# EAGLE board avr_programming_shield_Zif-Bill7 (EAGLE 6.4)
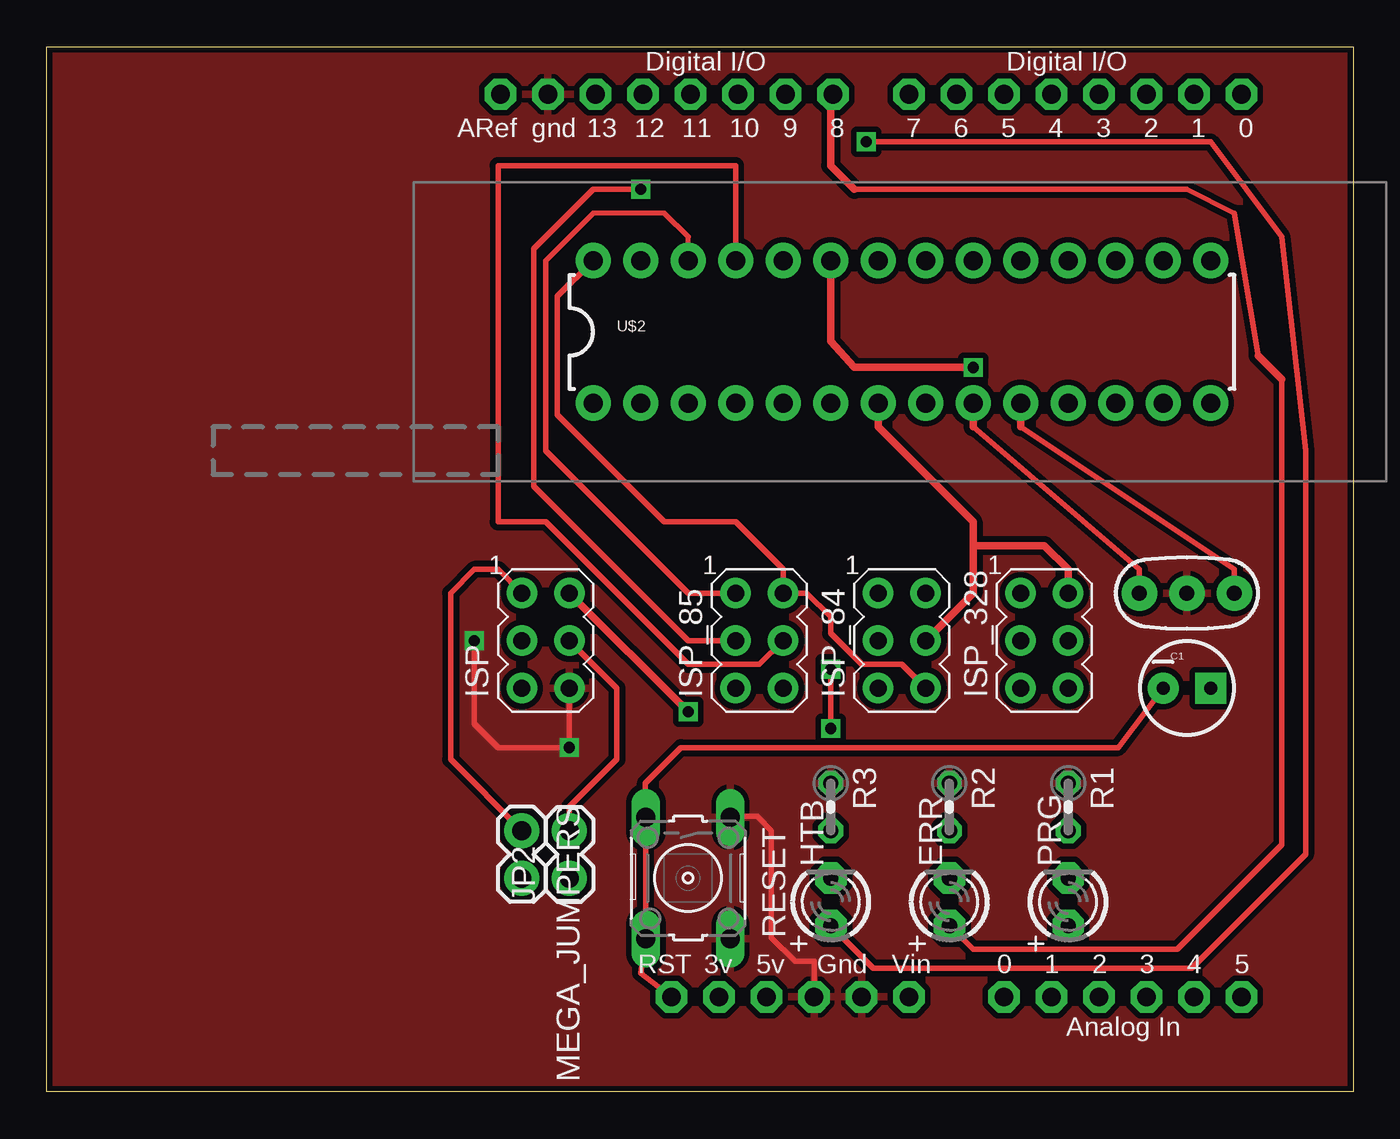
[diagram p0: board, top side]
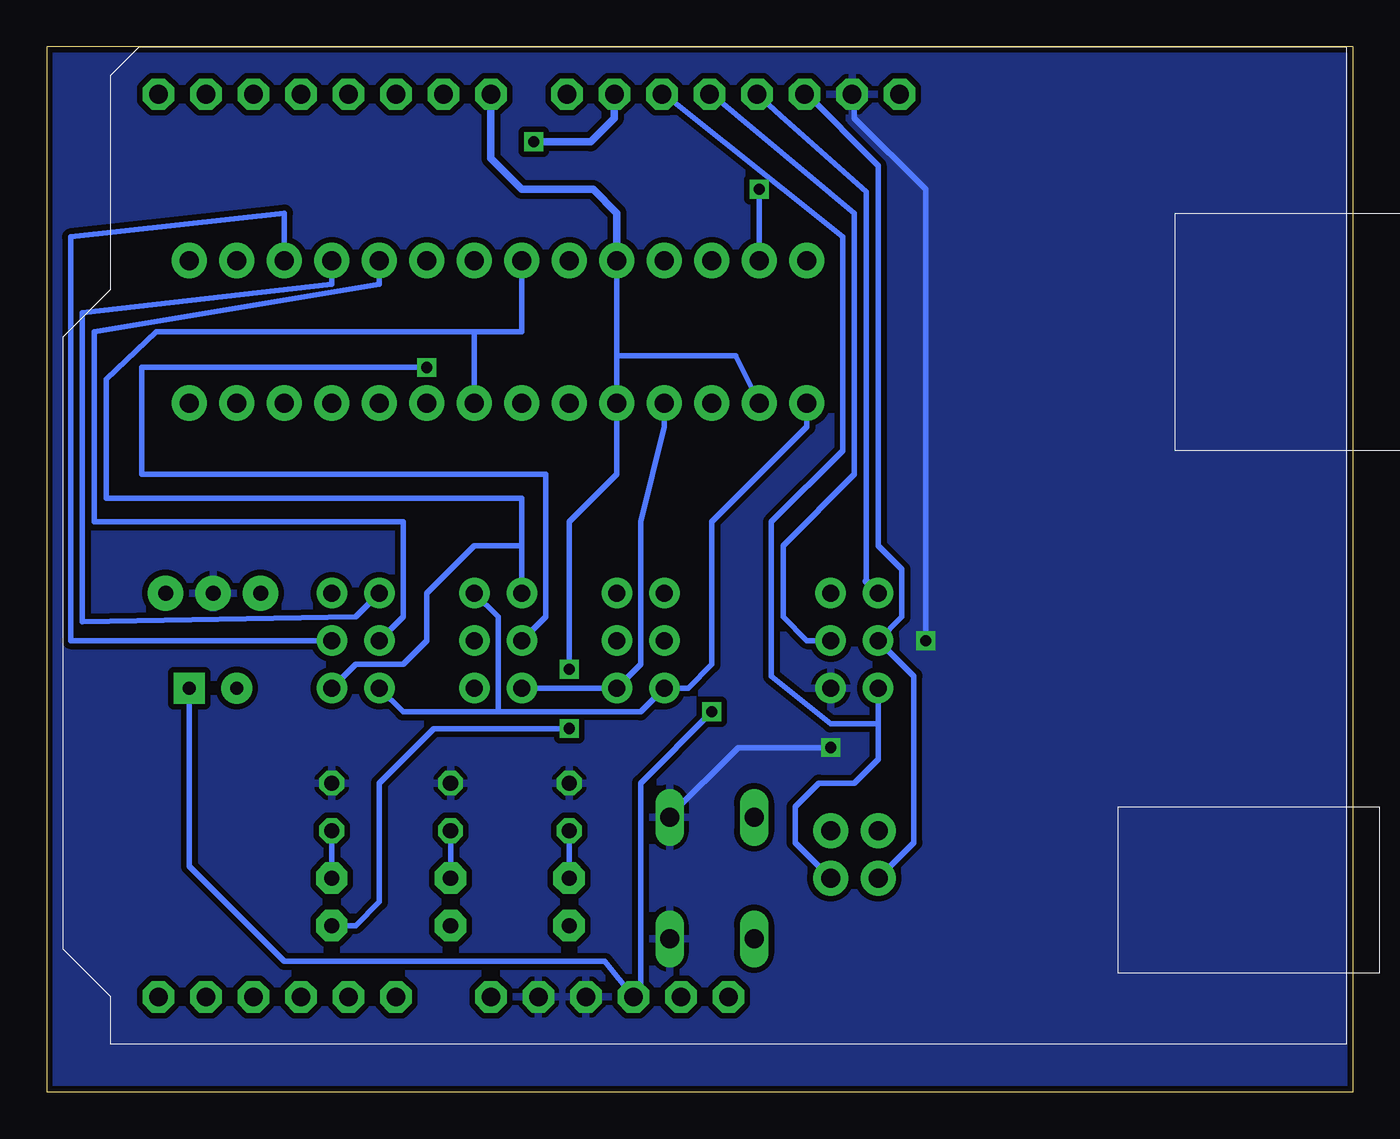
[diagram p1: board, bottom side, seen from below]

Size 69.85 x 55.88 mm. Coordinates in mm from the lower left corner, seen from the top.
Outline: 0,55.88 69.85,55.88 69.85,0 0,0 0,55.88
Copper layers (1*16): Top 0.035mm / dielectric 1.5mm / Bottom 0.035mm
Design rules "default *": minimum track width 12mil, minimum drill 19mil, track to track 12mil, track to pad 12mil, pad to pad 12mil, via to via 12mil, smd to smd 0mil, copper to edge 12mil, drill to drill 8mil, minimum pad ring 10mil, minimum via ring 8mil, stop-mask expansion 4mil, vias tented up to drill 20mil, thermal gap 10mil
Net classes: 1 power: width 0.61 mm

## Footprints (pad centres in the part's own frame; a part is rotated, then mirrored left to right if it is on the bottom)
RESONATOR-PTH = drill 0.8 pad 1.88: 1 -2.54,0; 2 0,0; 3 2.54,0
CPOL-RADIAL-10UF-25V = drill 0.7 pad 1.651 square: 1 1.27,0 | drill 0.7 pad 1.651: 2 -1.27,0
LED3MM = drill 0.813 pad 1.676 octagon: A -1.27,0; K 1.27,0
AVRISP = drill 0.9 pad 1.626: 1 -1.27,2.54; 2 1.27,2.54; 3 -1.27,0; 4 1.27,0; 5 -1.27,-2.54; 6 1.27,-2.54
1X02 = drill 1.016 pad 1.88: 1 0,0; 2 2.54,0
0204V = drill 0.813 octagon: 1 -1.27,0; 2 1.27,0
B3F-10XX = drill 1.016 long: 1 -3.251,2.261; 2 3.251,2.261; 3 -3.251,-2.261; 4 3.251,-2.261
ARDUINO-NOHOLE = drill 1 pad 1.676 octagon: 3V 35.56,2.54; 5V 38.1,2.54; A0 50.8,2.54; A1 53.34,2.54; A2 55.88,2.54; A3 58.42,2.54; A4 60.96,2.54; A5 63.5,2.54; AREF 23.876,50.8; D0 63.5,50.8; D1 60.96,50.8; D2 58.42,50.8; D3 55.88,50.8; D4 53.34,50.8; D5 50.8,50.8; D6 48.26,50.8; D7 45.72,50.8; D8 41.656,50.8; D9 39.116,50.8; D10 36.576,50.8; D11 34.036,50.8; D12 31.496,50.8; D13 28.956,50.8; GND 26.416,50.8; GND1 43.18,2.54; GND2 40.64,2.54; RESET 33.02,2.54; VIN 45.72,2.54
DIL28-3-ZIF_SOCKET = drill 1.016 pad 1.88: 1 -16.51,-3.81; 2 -13.97,-3.81; 3 -11.43,-3.81; 4 -8.89,-3.81; 5 -6.35,-3.81; 6 -3.81,-3.81; 7 -1.27,-3.81; 8 1.27,-3.81; 9 3.81,-3.81; 10 6.35,-3.81; 11 8.89,-3.81; 12 11.43,-3.81; 13 13.97,-3.81; 14 16.51,-3.81; 15 16.51,3.81; 16 13.97,3.81; 17 11.43,3.81; 18 8.89,3.81; 19 6.35,3.81; 20 3.81,3.81; 21 1.27,3.81; 22 -1.27,3.81; 23 -3.81,3.81; 24 -6.35,3.81; 25 -8.89,3.81; 26 -11.43,3.81; 27 -13.97,3.81; 28 -16.51,3.81

## Placement (x,y rotation side)
16MHZ  RESONATORPTH  [RESONATOR-PTH]  60.96,26.67 0 top
C1  10uF  [CPOL-RADIAL-10UF-25V]  60.96,21.59 0 top
E$1  [OSHWLOGO_TOL_0.2]  79.5,28.32 0 top  (outside the outline)
ERR  [LED3MM]  48.26,10.16 90 top
HTB  [LED3MM]  41.92,10.16 90 top
ISP  AVRISP-6  [AVRISP]  26.67,24.13 0 top
ISP_84  AVRISP-6  [AVRISP]  45.72,24.13 0 top
ISP_85  AVRISP-6  [AVRISP]  38.1,24.13 0 top
ISP_328  AVRISP-6  [AVRISP]  53.34,24.13 0 top
JP2  [1X02]  27.94,11.43 90 top
MEGA_JUMPERS  [1X02]  25.4,13.97 270 top
PRG  [LED3MM]  54.61,10.16 90 top
R1  [0204V]  54.61,15.24 270 top
R2  [0204V]  48.26,15.24 270 top
R3  [0204V]  41.91,15.24 270 top
RESET  [B3F-10XX]  34.29,11.43 270 top
U$1  ARDUINO-NOHOLE  [ARDUINO-NOHOLE]  0.38,2.54 0 top
U$2  ZIFSOCKET-28-3ZIFFSOCKET-28-3  [DIL28-3-ZIF_SOCKET]  45.72,40.64 0 top

## Library data of the parts
16MHZ C1 JP2 MEGA_JUMPERS = SparkFun
E$1 ERR HTB ISP ISP_84 ISP_85 ISP_328 PRG R1-R3 U$1 = adafruit
RESET = switch-omron
U$2 = SparkFun-Connectors

## Nets
3V: U$1.3V
COMMON_D3: PRG.A U$1.D7 U$2.2 U$2.5 U$2.24
GND [power]: 16MHZ.2 ISP.6 R1.1 R2.1 R3.1 RESET.1 RESET.2 U$1.GND U$1.GND1 U$1.GND2
N$1: ISP_328.4 U$2.17
N$2: ISP.3 MEGA_JUMPERS.2 U$1.D13
N$3: ISP.1 MEGA_JUMPERS.1 U$1.D12
N$4: ISP_328.1 U$2.18
N$5: ISP.5 JP2.1 U$1.D10
N$6: ISP.4 JP2.2 U$1.D11
N$7: ISP_328.3 U$2.19
N$8: PRG.K R1.2
N$9: ERR.K R2.2
N$10: HTB.K R3.2
N$11: ISP_84.4 ISP_328.2 U$2.7
N$13: ISP_84.2 ISP_85.5 ISP_328.5 U$2.1
N$15: ISP_84.3 U$2.23
N$16: ISP_84.6 ISP_85.2 U$2.28
N$17: HTB.A U$1.D9
N$18: ISP_84.5 ISP_85.6 U$2.4
N$19: ISP_85.4 U$2.25
N$20: ISP_85.1 U$2.26
N$21: ISP_85.3 U$2.27
N$22: 16MHZ.1 U$2.9
N$24: ERR.A U$1.D8
N$25: 16MHZ.3 U$2.10
N$26: ISP_84.1 ISP_328.6 U$2.8 U$2.22
RESET: C1.2 RESET.3 RESET.4 U$1.RESET
VCC: C1.1 ISP.2 U$1.5V
VIN: U$1.VIN

## Tracks (layer width: path | path; a pad name or v marks a point on that pad's centre or on a via)
COMMON_D3  (via drill 0.6)
  Top 0.305: v41.91,22.61 v41.91,19.43
  Bottom 0.305: U$2.2 33.02,39.37 39.37,39.37 | U$2.24 39.37,39.37 | 39.37,39.37 U$2.5 39.37,33.02 41.91,30.48 v41.91,22.61 | v41.91,19.43 49.15,19.43 52.07,16.51 52.07,10.16 53.34,8.89 PRG.A
  Bottom 0.406: U$1.D7 46.1,49.91 44.45,48.26 40.64,48.26 39.37,46.99 U$2.24
GND  (via drill 0.6)
  Top 0.305: v22.86,24.13 22.86,19.68 24.13,18.41 v27.94,18.41 ISP.6 | 36.58,14.73 37.97,14.73 38.73,13.97 38.73,8.26 40.01,6.98 41.02,6.98 U$1.GND2
  Bottom 0.305: 26.67,53.34 26.67,52.07 22.86,48.26 v22.86,24.13 | v27.94,18.41 32.89,18.41 36.58,14.73
  pour Bottom: 0,55.88 69.85,55.88 69.85,0 0,0
  pour Top: 0,55.88 69.85,55.88 69.85,0 0,0
N$1
  Bottom 0.305: U$2.17 57.15,46.99 68.58,45.72 68.58,24.13 ISP_328.4
N$2
  Bottom 0.305: 29.34,53.47 25.4,49.53 25.4,29.21 24.13,27.94 24.13,25.4 ISP.3 23.5,22.22 23.5,13.33 MEGA_JUMPERS.2
  Bottom 0.406: U$1.D13 29.34,53.47
N$3
  Top 0.305: ISP.1 24.13,27.94 22.86,27.94 21.59,26.67 21.59,17.78 MEGA_JUMPERS.1
  Bottom 0.305: U$1.D12 30.61,52.2 26.04,48.13 26.04,27.3
  Bottom 0.406: 26.04,27.3 ISP.1
N$4
  Bottom 0.305: U$2.18 54.61,43.18 67.94,41.66 67.94,25.15 53.34,25.4 ISP_328.1
N$5
  Bottom 0.305: 36.83,53.34 27.3,45.72 27.3,34.29 31.11,30.48 31.11,22.22 27.94,19.68 25.4,19.68 | 25.4,19.68 ISP.5 | JP2.1 29.84,13.33 29.84,15.24 28.57,16.51 26.67,16.51 25.4,17.78 25.4,19.68
  Bottom 0.406: U$1.D10 36.83,53.34
N$6
  Top 0.305: ISP.4 30.48,21.59 30.48,17.78 27.94,15.24 JP2.2
  Bottom 0.305: 34.29,53.34 26.67,46.99 26.67,33.02 30.48,29.21 30.48,25.4 29.21,24.13 ISP.4
  Bottom 0.406: U$1.D11 34.29,53.34
N$7
  Bottom 0.305: U$2.19 52.07,43.18 67.31,40.64 67.31,30.48 50.8,30.48 50.8,25.4 ISP_328.3
N$8
  Bottom 0.305: R1.2 PRG.K
N$9
  Bottom 0.305: R2.2 ERR.K
N$10
  Bottom 0.305: R3.2 HTB.K
N$11
  Top 0.406: ISP_328.2 54.61,27.94 53.34,29.21 49.53,29.21 | 49.53,29.21 49.53,26.67 ISP_84.4 | U$2.7 44.45,35.56 49.53,30.48 49.53,29.21
N$13
  Bottom 0.305: U$2.1 29.21,35.56 34.29,30.48 34.29,22.86 35.56,21.59 ISP_85.5 38.1,20.32 45.72,20.32 | 45.72,20.32 45.72,25.4 ISP_84.2 | ISP_328.5 50.8,20.32 45.72,20.32
N$15  (via drill 0.6)
  Top 0.406: U$2.23 41.91,40.13 43.18,38.74 v49.53,38.74
  Bottom 0.305: ISP_84.3 43.18,25.4 43.18,33.02 64.77,33.02 64.77,38.74 v49.53,38.74
N$16
  Top 0.305: ISP_84.6 45.72,22.86 43.56,22.86 41.91,24.51 41.91,25.4 40.64,26.67 ISP_85.2 39.37,27.94 36.83,30.48 33.02,30.48 27.3,36.2 27.3,42.55 U$2.28
N$17  (via drill 0.6)
  Top 0.305: v43.81,50.8 62.23,50.8 66.04,45.72 67.31,34.29 67.31,12.7 61.21,6.6 44.2,6.6 HTB.A
  Bottom 0.406: U$1.D9 39.5,52.07 40.77,50.8 v43.81,50.8
N$18
  Bottom 0.305: U$2.4 36.83,35.56 38.1,30.48 38.1,22.86 ISP_85.6 ISP_84.5
N$19
  Top 0.305: U$2.25 36.83,49.53 24.13,49.53 24.13,30.48 26.67,30.48 34.29,22.86 38.1,22.86 ISP_85.4
N$20
  Top 0.254: U$2.26 34.29,45.72 | 33.02,46.99 29.21,46.99 26.67,44.45
  Top 0.305: 34.29,45.72 33.02,46.99 | 26.67,44.45 26.67,34.29 34.29,26.67 ISP_85.1
N$21  (via drill 0.6)
  Top 0.305: v31.75,48.26 29.21,48.26 26.04,45.09 26.04,32.38 34.29,24.13 ISP_85.3
  Bottom 0.305: U$2.27 v31.75,48.26
N$22
  Top 0.305: 16MHZ.1 58.42,27.94 49.53,35.56
  Top 0.406: 49.53,35.56 U$2.9
N$24
  Top 0.305: 43.18,48.26 60.96,48.26 63.5,46.99 64.77,39.37 | 66.04,38.1 66.04,13.21 60.45,7.62 49.53,7.62 ERR.A
  Top 0.406: U$1.D8 41.91,53.34 41.91,49.53 43.18,48.26 | 64.77,39.37 66.04,38.1
N$25
  Top 0.305: 16MHZ.3 63.5,27.94 52.07,35.56
  Top 0.406: 52.07,35.56 U$2.10
N$26
  Bottom 0.305: ISP_84.1 44.45,29.21 | 44.45,29.21 46.99,29.21 49.53,26.67 49.53,24.13 50.8,22.86 53.34,22.86 ISP_328.6 | 44.45,29.21 44.45,31.75 66.67,31.75 66.67,38.1 64.01,40.64 46.99,40.64 | 46.99,40.64 44.45,40.64 U$2.22 | U$2.8 46.99,40.64
RESET
  Top 0.305: U$1.RESET 31.75,6.35 RESET.4 RESET.3 32,16.51 33.91,18.41 57.28,18.41 C1.2
VCC  (via drill 0.6)
  Top 0.406: v34.29,20.32 ISP.2
  Bottom 0.305: C1.1 62.23,12.06 57.15,6.98 40.01,6.98 U$1.5V 38.1,5.59 38.1,16.51 v34.29,20.32